# Altium PCB DIO_RJ45_DIOT.PCBDOC (part 5 of 6)
Units mil, origin at the board's own origin, x right, y up, seen from the top; angles counter-clockwise.
Board outline 8758.72 x 3941.04 mil, 4 copper layers (TopLayer, MidLayer1, Internal Plane 1, BottomLayer), stack 46.562 mil thick; 318 components, 196 nets, 1276 pads, 687 vias.
Unrouted connection lines stored in the file: 2.
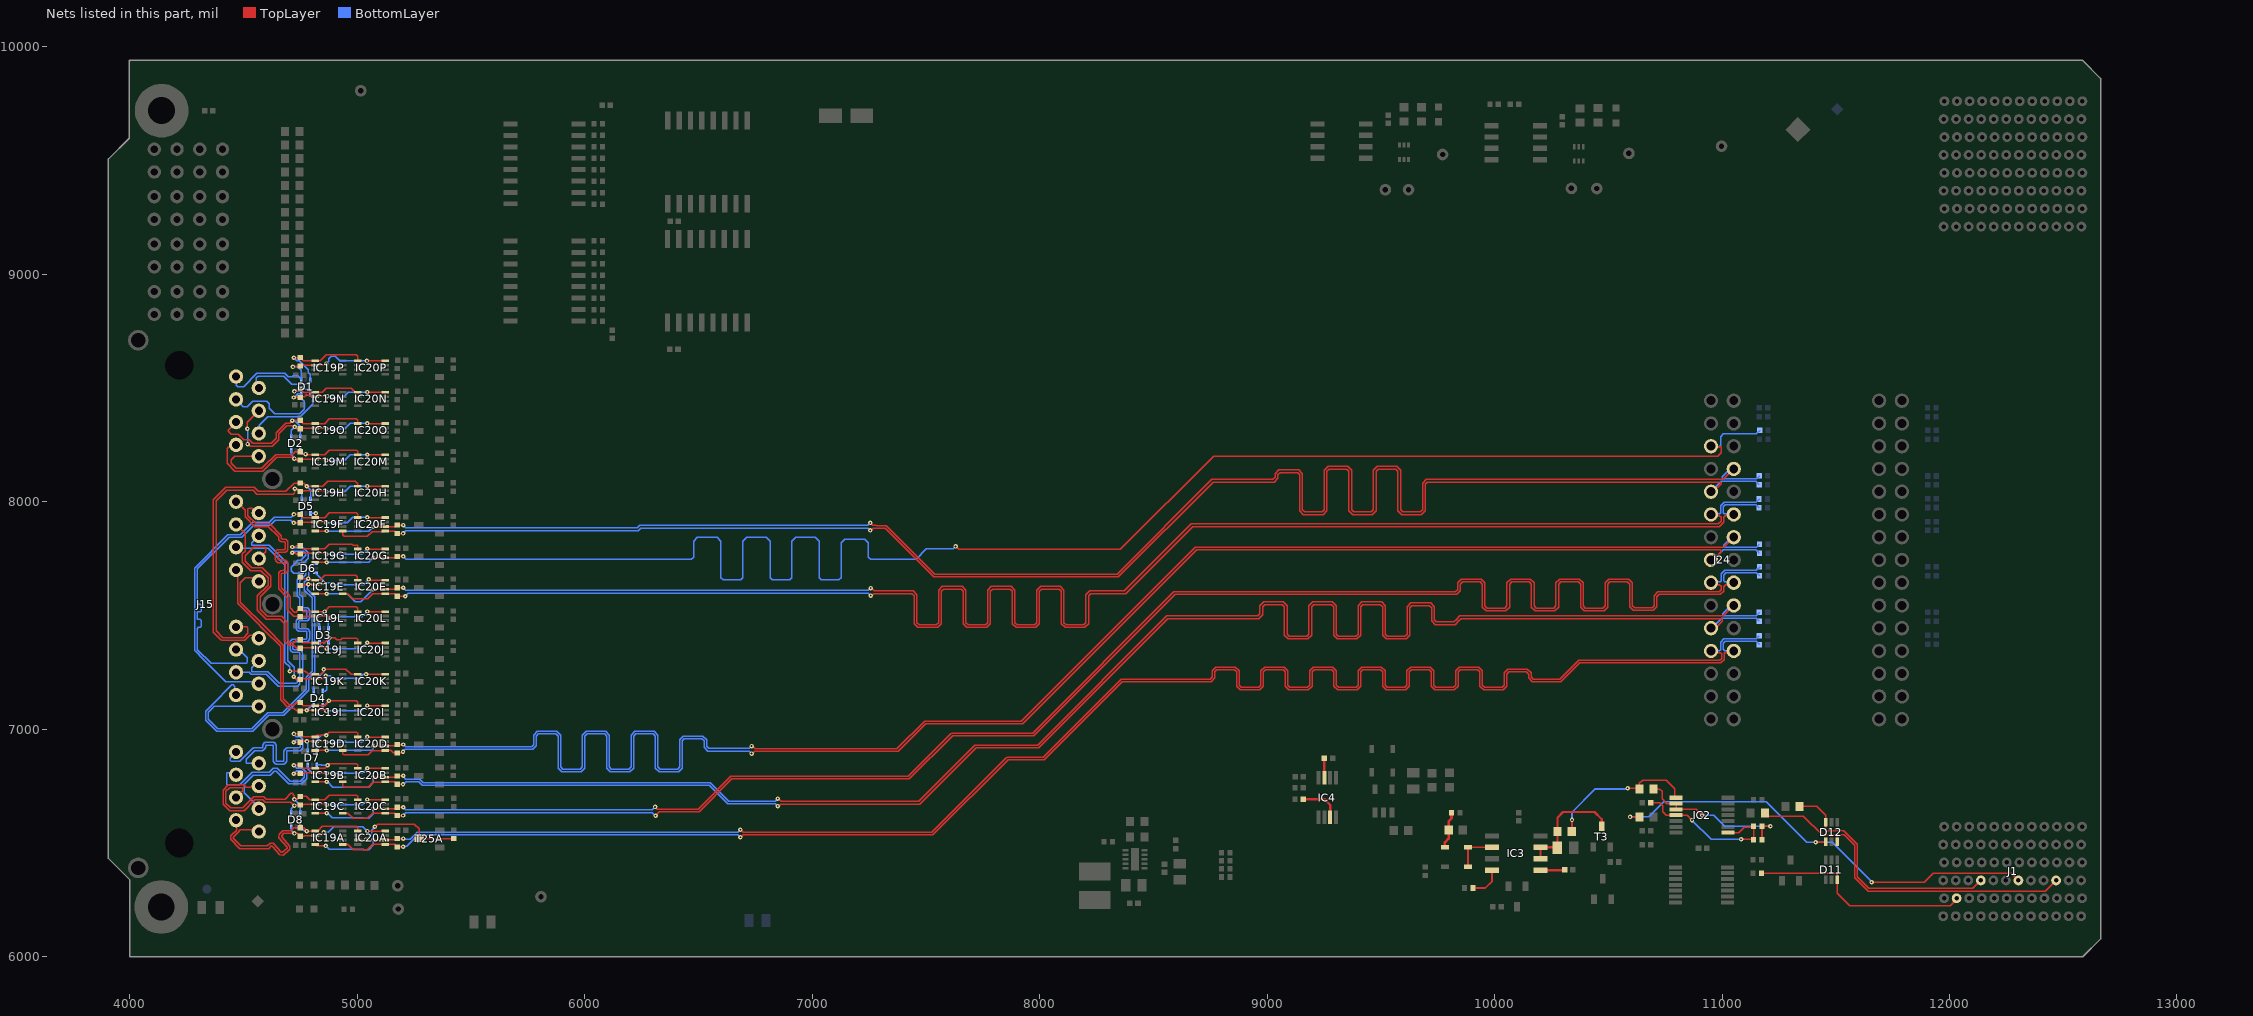
[diagram p6: the nets of this part, all layers, seen from the top]

## Via types
v1: diameter 19.68, hole 7.87, TopLayer to BottomLayer, tented both sides, 672 vias
v2: diameter 31.5, hole 19.68, TopLayer to BottomLayer, 10 vias
v3: diameter 23.62, hole 11.81, TopLayer to BottomLayer, tented both sides, 5 vias

## Nets (pads, with @x,y where several pads share a name; then routed paths per layer and width w, separated by ;. In a path a pad name is that pad's centre, name@x,y a point inside that pad or via, vN(x,y) a via of type N, cw(c..) or ccw(c..) an arc to the next point about the centre after c; other vN are vias at no path point) (continued)
LVDS9_P: IC19G.8 IC20G.6 J24.5 R24.2 R132G.1 | length 7913.8
  TopLayer w6: IC19G.8@4815.1,7732.67 v1(4866.6,7732.67) ; v1(5071.28,7752.35) IC20G.6@5124.15,7752.35 5168.78,7752.35 5176.13,7759.7 R132G.1@5176.13,7758.7 v1(5202.63,7758.7) ; v1(7630.68,7802.45) 7631.17,7802.45 7644.25,7789.37 8354.94,7789.37 8765.21,8199.65 8767.75,8199.65 8767.91,8199.8 10981.49,8199.8 10997.05,8215.36 10997.05,8237.84 10993.53,8241.36 10953.64,8241.36 J24.5@10951.68,8243.33
  BottomLayer w6: v1(4866.6,7732.67) 4867.07,7733.14 5052.07,7733.14 v1(5071.28,7752.35) ; v1(5202.63,7758.7) 5203.66,7758.7 5216.16,7746.2 6463.09,7746.2 6469.6,7746.2 6479.2,7755.8 6479.2,7826.28 6495.83,7842.91 6582.57,7842.91 6599.2,7826.28 6599.2,7665.73 6608.8,7656.13 6685.6,7656.13 6695.2,7665.73 6695.2,7826.28 6711.83,7842.91 6798.57,7842.91 6815.2,7826.28 6815.2,7665.73 6824.8,7656.13 6901.6,7656.13 6911.2,7665.73 6911.2,7826.28 6927.83,7842.91 7014.57,7842.91 7031.2,7826.28 7031.2,7665.73 7040.8,7656.13 7117.6,7656.13 7127.2,7665.73 7127.2,7817.78 7143.83,7834.41 7230.57,7834.41 7247.2,7817.78 7247.2,7755.8 7256.8,7746.2 7310.04,7746.2 7456.83,7746.2 7502.58,7791.95 7620.13,7791.95 v1@7630.63,7802.45 ; J24.5@10953.64,8241.36 10954.19,8241.9 10988.66,8241.9 10993.51,8246.76 10993.51,8285.64 11005.11,8297.24 11150.34,8297.24 11156.67,8303.58 11157.46,8303.58 11165.88,8311.99 R24.2@11165.88,8312.78
LVDS10_N: IC19F.1 IC20F.5 J24.9 R27.2 R132F.2 | length 7737
  TopLayer w6: IC19F.1@4937.15,7870.46 4937.15,7854.19 4944.19,7847.15 5044.93,7847.15 5065.77,7867.99 5121.68,7867.99 IC20F.5@5124.15,7870.46 5166.15,7870.46 5176.13,7860.49 R132F.2@5176.13,7859.49 v1@5201.62,7859.49 ; v1(7255.91,7873.03) 7259.61,7873.03 7269.45,7882.87 7320.87,7882.87 7530.94,7672.8 7534.45,7669.29 8346.46,7669.29 8762.8,8085.63 8864.17,8085.63 9030.98,8085.63 9047.6,8102.25 9047.6,8117.24 9057.2,8126.84 9134,8126.84 9143.6,8117.24 9143.6,7958.94 9160.22,7942.32 9246.95,7942.32 9263.57,7958.94 9263.57,8132.72 9273.17,8142.32 9349.97,8142.32 9359.57,8132.72 9359.57,7958.94 9376.19,7942.32 9462.91,7942.32 9479.53,7958.94 9479.53,8132.72 9489.13,8142.32 9565.93,8142.32 9575.53,8132.72 9575.53,7958.94 9592.16,7942.32 9678.88,7942.32 9695.5,7958.94 9695.5,8076.03 9705.1,8085.63 9711.61,8085.63 10993.64,8085.63 10997.16,8082.12 10997.16,8077.14 10986.14,8066.13 10958.66,8038.65 J24.9@10958.66,8034.45
  BottomLayer w6: v1(5202.13,7859.99) 5214.69,7872.55 6236.66,7872.55 6247.78,7883.67 7245.27,7883.67 v1(7255.91,7873.03) ; J24.9@10951.68,8043.33 10997.13,8088.78 11147.92,8088.78 11154.38,8082.32 11155.16,8082.32 11163.58,8073.9 R27.2@11163.58,8073.11
LVDS10_P: IC19F.8 IC20F.6 J24.8 R26.2 R132F.1 | length 7846.6
  TopLayer w6: IC19F.8@4815.1,7870.46 v1(4866.6,7870.46) ; v1(5071.28,7890.15) IC20F.6@5124.15,7890.15 5168.78,7890.15 5176.13,7897.5 R132F.1@5176.13,7896.5 v1(5202.63,7896.5) ; v1(7255.99,7906.03) 7267.34,7894.69 7281.5,7894.69 7281.56,7894.62 7326.07,7894.62 7539.41,7681.28 8341.49,7681.28 8757.83,8097.61 8864.17,8097.61 9026.01,8097.61 9035.61,8107.21 9035.61,8122.21 9052.23,8138.83 9138.96,8138.83 9155.58,8122.21 9155.58,7963.91 9165.18,7954.31 9241.98,7954.31 9251.58,7963.91 9251.58,8137.69 9268.2,8154.31 9354.93,8154.31 9371.55,8137.69 9371.55,7963.91 9381.15,7954.31 9457.95,7954.31 9467.55,7963.91 9467.55,8137.69 9484.17,8154.31 9570.9,8154.31 9587.52,8137.69 9587.52,7963.91 9597.12,7954.31 9673.92,7954.31 9683.52,7963.91 9683.52,8080.99 9700.14,8097.61 9711.61,8097.61 11005.96,8097.61 J24.8@11051.68,8143.33
  BottomLayer w6: v1(4866.6,7870.46) 5051.6,7870.46 v1(5071.28,7890.15) ; v1(5202.63,7896.5) 5214.57,7884.55 6231.69,7884.55 6242.81,7895.67 7245.63,7895.67 v1(7255.99,7906.03) ; J24.8@11051.68,8143.33 11037.03,8143.33 11001.96,8108.26 11001.96,8103.29 11005.48,8099.78 11150.1,8099.78 11153.61,8103.28 11155.16,8103.28 11163.58,8111.7 R26.2@11163.58,8112.48
LVDS11_N: IC19E.1 IC20E.5 J24.12 R29.2 R132E.2 | length 7738
  TopLayer w6: IC19E.1@4937.15,7594.87 4958.68,7594.87 4981.15,7572.41 5045.78,7572.41 5068.25,7594.87 IC20E.5@5124.15,7594.87 5166.15,7594.87 5176.13,7584.9 R132E.2@5176.13,7583.9 v1(5211.85,7583.9) ; v1(7257.87,7586.61) 7261.58,7586.61 7270.44,7595.47 7324.8,7595.47 7439.07,7595.47 7448.67,7585.87 7448.67,7462.95 7465.19,7446.43 7551.78,7446.43 7568.3,7462.95 7568.3,7605.16 7577.9,7614.76 7654.7,7614.76 7664.3,7605.16 7664.3,7462.95 7680.81,7446.43 7767.4,7446.43 7783.92,7462.95 7783.92,7605.16 7793.52,7614.76 7870.32,7614.76 7879.92,7605.16 7879.92,7462.95 7896.44,7446.43 7983.02,7446.43 7999.54,7462.95 7999.54,7605.16 8009.14,7614.76 8085.94,7614.76 8095.54,7605.16 8095.54,7462.95 8112.06,7446.43 8198.64,7446.43 8215.16,7462.95 8215.16,7585.87 8224.76,7595.47 8280.48,7595.47 8377.95,7595.47 8672.46,7889.98 10988.38,7889.98 11007.5,7909.1 11007.5,7931.4 11014.69,7938.6 11046.95,7938.6 J24.12@11051.68,7943.33
  BottomLayer w6: v1@5212.06,7584.4 5224.62,7596.96 7247.53,7596.96 v1(7257.87,7586.61) ; J24.12@11051.68,7943.33 11048.15,7946.85 11008.87,7946.85 11004.73,7950.99 11004.73,7976.38 11014.17,7985.82 11149.07,7985.82 11153.87,7981.03 11154.65,7981.03 11163.07,7972.61 R29.2@11163.07,7971.82
LVDS11_P: IC19E.8 IC20E.6 J24.11 R28.2 R132E.1 | length 7865.9
  TopLayer w6: IC19E.8@4815.1,7594.87 v1(4866.6,7594.87) ; v1(5071.28,7614.56) IC20E.6@5124.15,7614.56 5168.78,7614.56 5176.13,7621.91 R132E.1@5176.13,7620.91 v1(5202.63,7620.91) ; v1(7257.96,7619.61) 7259.95,7619.61 7272.28,7607.28 7324.8,7607.28 7443.97,7607.28 7460.49,7590.76 7460.49,7467.84 7470.09,7458.24 7546.89,7458.24 7556.49,7467.84 7556.49,7610.06 7573,7626.57 7659.59,7626.57 7676.11,7610.06 7676.11,7467.84 7685.71,7458.24 7762.51,7458.24 7772.11,7467.84 7772.11,7610.06 7788.63,7626.57 7875.21,7626.57 7891.73,7610.06 7891.73,7467.84 7901.33,7458.24 7978.13,7458.24 7987.73,7467.84 7987.73,7610.06 8004.25,7626.57 8090.83,7626.57 8107.35,7610.06 8107.35,7467.84 8116.95,7458.24 8193.75,7458.24 8203.35,7467.84 8203.35,7590.76 8219.87,7607.28 8280.48,7607.28 8373.06,7607.28 8667.57,7901.79 10983.48,7901.79 10995.68,7913.99 10995.68,7931.48 10988.66,7938.5 10966.02,7938.5 J24.11@10959.65,7944.88
  BottomLayer w6: v1(4866.6,7594.87) 4957.19,7594.87 4992.19,7559.88 5016.61,7559.88 v1(5071.28,7614.56) ; v1(5202.63,7620.91) 5214.57,7608.96 7247.31,7608.96 v1(7257.96,7619.61) ; J24.11@10951.68,7943.33 10955.2,7946.85 10990.16,7946.85 10993.73,7950.43 10993.73,7980.94 11009.62,7996.82 11148.65,7996.82 11153.87,8002.04 11154.65,8002.04 11163.07,8010.45 R28.2@11163.07,8011.24
LVDS12_N: IC19D.1 IC20D.5 J24.15 R31.2 R132D.2 | length 7747.2
  TopLayer w6: IC19D.1@4937.15,6905.9 4937.15,6889.58 4940.66,6886.06 5048.41,6886.06 5065.77,6903.43 5121.68,6903.43 IC20D.5@5124.15,6905.9 5148.35,6905.9 5158.44,6895.81 5175.23,6895.81 R132D.2@5176.13,6894.92 5201.62,6894.92 v1(5201.62,6899.62) ; v1(6734.13,6892.14) 6737.84,6892.14 6747.28,6901.57 7378.01,6901.57 7499.07,7022.64 7925.2,7022.64 8689.96,7787.4 10878.03,7787.4 10992.5,7787.4 10996.01,7783.89 10996.01,7778.92 10960.42,7743.33 J24.15@10951.68,7743.33
  BottomLayer w6: v1(5201.62,6899.62) 5201.62,6899.92 5211.98,6910.28 5760.42,6910.28 5771.2,6910.28 5787.24,6926.32 5787.24,6969.05 5796.84,6978.65 5873.64,6978.65 5883.24,6969.05 5883.24,6828.62 5899.29,6812.58 5985.2,6812.58 6001.24,6828.62 6001.24,6969.05 6010.84,6978.65 6087.64,6978.65 6097.24,6969.05 6097.24,6828.62 6113.29,6812.58 6199.2,6812.58 6215.24,6828.62 6215.24,6969.05 6224.84,6978.65 6301.64,6978.65 6311.24,6969.05 6311.24,6828.62 6327.29,6812.58 6413.2,6812.58 6429.24,6828.62 6429.24,6948.05 6438.84,6957.65 6515.64,6957.65 6525.24,6948.05 6525.24,6919.41 6541.29,6903.37 6613.19,6903.37 6722.9,6903.37 v1(6734.13,6892.14) ; J24.15@10960.42,7743.33 11005.31,7788.21 11148.99,7788.21 11155.36,7781.84 11156.15,7781.84 11164.57,7773.43 R31.2@11164.57,7772.64
LVDS12_P: IC19D.8 IC20D.6 J24.14 R30.2 R132D.1 | length 7859.6
  TopLayer w6: IC19D.8@4815.1,6905.9 v1(4866.6,6905.9) ; v1(5071.28,6925.58) IC20D.6@5124.15,6925.58 5168.78,6925.58 5175.63,6932.43 R132D.1@5176.13,6931.93 v1(5202.63,6931.93) ; v1(6734.22,6925.13) 6737.38,6925.13 6749.12,6913.39 7373.11,6913.39 7494.18,7034.45 7920.3,7034.45 8685.07,7799.21 10884.87,7799.21 11007.56,7799.21 J24.14@11051.68,7843.33
  BottomLayer w6: v1(4866.6,6905.9) 4868.13,6907.43 5067.76,6907.43 5071.28,6910.94 v1(5071.28,6925.58) ; v1(5202.63,6931.93) 5202.63,6931.63 5212.99,6921.28 5760.42,6921.28 5766.64,6921.28 5776.24,6930.88 5776.24,6973.61 5792.29,6989.65 5878.2,6989.65 5894.24,6973.61 5894.24,6833.18 5903.84,6823.58 5980.64,6823.58 5990.24,6833.18 5990.24,6973.61 6006.29,6989.65 6092.2,6989.65 6108.24,6973.61 6108.24,6833.18 6117.84,6823.58 6194.64,6823.58 6204.24,6833.18 6204.24,6973.61 6220.29,6989.65 6306.2,6989.65 6322.24,6973.61 6322.24,6833.18 6331.84,6823.58 6408.64,6823.58 6418.24,6833.18 6418.24,6952.61 6434.29,6968.65 6520.2,6968.65 6536.24,6952.61 6536.24,6923.97 6545.84,6914.37 6613.19,6914.37 6723.46,6914.37 v1(6734.22,6925.13) ; J24.14@11051.68,7843.33 11044.11,7843.33 11008.49,7807.7 11008.49,7802.73 11012,7799.21 11151.77,7799.21 11155.36,7802.8 11156.15,7802.8 11164.57,7811.22 R30.2@11164.57,7812.01
LVDS13_N: IC19C.1 IC20C.5 J24.18 R33.2 R132C.2 | length 7704.1
  TopLayer w6: IC19C.1@4937.15,6630.31 4958.68,6630.31 4982,6606.99 5044.93,6606.99 5068.25,6630.31 IC20C.5@5124.15,6630.31 5166.15,6630.31 5176.13,6620.33 R132C.2@5176.13,6619.33 5201.62,6619.33 v1(5202.13,6619.83) ; v1(6312.27,6619.09) 6312.27,6620.2 6328.29,6636.23 6503.59,6636.23 6647.88,6780.51 7428.15,6780.51 7618.11,6970.47 7974.41,6970.47 7981.44,6977.5 8595.47,7591.54 9821.85,7591.54 9833.34,7591.54 9849.97,7608.16 9849.97,7637.24 9859.57,7646.84 9936.37,7646.84 9945.97,7637.24 9945.97,7536.3 9962.59,7519.67 10049.34,7519.67 10065.97,7536.3 10065.97,7637.24 10075.57,7646.84 10152.37,7646.84 10161.97,7637.24 10161.97,7536.3 10178.59,7519.67 10265.34,7519.67 10281.97,7536.3 10281.97,7637.24 10291.57,7646.84 10368.37,7646.84 10377.97,7637.24 10377.97,7536.3 10394.59,7519.67 10481.34,7519.67 10497.97,7536.3 10497.97,7637.24 10507.57,7646.84 10584.37,7646.84 10593.97,7637.24 10593.97,7537.72 10610.59,7521.09 10697.34,7521.09 10713.97,7537.72 10713.97,7581.94 10723.57,7591.54 10968.87,7591.54 10993.35,7591.54 11008.06,7606.25 11008.06,7626.17 11015.75,7633.86 11042.21,7633.86 J24.18@11051.68,7643.33
  BottomLayer w6: v1(5202.13,6619.83) 5214.69,6632.39 6183.3,6632.39 6183.4,6632.29 6297.96,6632.29 6311.15,6619.09 v1(6312.27,6619.09) ; J24.18@11051.68,7643.33 11047.33,7647.67 11010.59,7647.67 11007.07,7651.19 11007.07,7676.95 11016.87,7686.75 11151.63,7686.75 11155.69,7682.69 11156.47,7682.69 11164.89,7674.28 R33.2@11164.89,7673.49
LVDS13_P: IC19C.8 IC20C.6 J24.17 R32.2 R132C.1 | length 7844
  TopLayer w6: IC19C.8@4815.1,6630.31 v1(4866.6,6630.31) ; v1(5071.28,6649.99) IC20C.6@5124.15,6649.99 5168.78,6649.99 5176.13,6657.34 R132C.1@5176.13,6656.34 v1(5202.63,6656.34) ; v1(6310.04,6657.48) 6311.15,6657.48 6320.41,6648.23 6498.62,6648.23 6642.91,6792.51 7423.18,6792.51 7609.63,6978.96 7613.14,6982.47 7969.44,6982.47 8590.5,7603.54 9821.85,7603.54 9828.37,7603.54 9837.97,7613.14 9837.97,7642.21 9854.59,7658.84 9941.34,7658.84 9957.97,7642.21 9957.97,7541.27 9967.57,7531.67 10044.37,7531.67 10053.97,7541.27 10053.97,7642.21 10070.59,7658.84 10157.34,7658.84 10173.97,7642.21 10173.97,7541.27 10183.57,7531.67 10260.37,7531.67 10269.97,7541.27 10269.97,7642.21 10286.59,7658.84 10373.34,7658.84 10389.97,7642.21 10389.97,7541.27 10399.57,7531.67 10476.37,7531.67 10485.97,7541.27 10485.97,7642.21 10502.59,7658.84 10589.34,7658.84 10605.97,7642.21 10605.97,7542.69 10615.57,7533.09 10692.37,7533.09 10701.97,7542.69 10701.97,7586.91 10718.59,7603.54 10968.87,7603.54 10988.38,7603.54 10996.06,7611.22 10996.06,7626.97 10988.33,7634.71 10960.3,7634.71 J24.17@10951.68,7643.33
  BottomLayer w6: v1(4866.6,6630.31) 4868.13,6631.83 4890.13,6609.83 5026.48,6609.83 5029.32,6606.99 5050.28,6606.99 5071.28,6627.99 v1(5071.28,6649.99) ; v1(5202.63,6656.34) 5214.57,6644.39 6188.27,6644.39 6188.38,6644.29 6297.96,6644.29 6310.04,6656.37 v1(6310.04,6657.48) ; J24.17@10951.68,7643.33 10955.71,7647.36 10992.56,7647.36 10996.07,7650.88 10996.07,7681.51 11012.31,7697.75 11149.78,7697.75 11155.69,7703.65 11156.47,7703.65 11164.89,7712.07 R32.2@11164.89,7712.86
LVDS14_N: IC19B.1 IC20B.5 J24.21 R35.2 R132B.2 | length 7733.9
  TopLayer w6: IC19B.1@4937.15,6768.1 4937.15,6746.48 4940.66,6742.97 5048.46,6742.97 5071.13,6765.63 5121.68,6765.63 IC20B.5@5124.15,6768.1 5166.15,6768.1 5176.13,6758.13 R132B.2@5176.13,6757.13 v1(5201.62,6757.13) ; v1(6848.81,6661.17) 6852.51,6661.17 6861.62,6670.28 7473.81,6670.28 7720.86,6917.32 7996.06,6917.32 8563.98,7485.24 8952.76,7485.24 8964.11,7485.24 8980.63,7501.75 8980.63,7537.06 8990.23,7546.66 9067.03,7546.66 9076.63,7537.06 9076.63,7412.75 9093.15,7396.23 9179.73,7396.23 9196.25,7412.75 9196.25,7537.06 9205.85,7546.66 9282.65,7546.66 9292.25,7537.06 9292.25,7412.75 9308.77,7396.23 9395.35,7396.23 9411.87,7412.75 9411.87,7537.06 9421.47,7546.66 9498.27,7546.66 9507.87,7537.06 9507.87,7412.75 9524.39,7396.23 9610.97,7396.23 9627.49,7412.75 9627.49,7532.83 9637.09,7542.43 9713.89,7542.43 9723.49,7532.83 9723.49,7475.64 9740.01,7459.12 9826.6,7459.12 9843.12,7475.64 9852.72,7485.24 9982.28,7485.24 10998.3,7485.24 11001.82,7481.72 11001.82,7474.62 10981.43,7454.23 10962.58,7454.23 J24.21@10951.68,7443.33
  BottomLayer w6: v1(5201.62,6757.13) 5204.28,6757.13 5216.18,6769.03 5271.32,6769.03 5280.2,6760.15 5286.65,6753.71 6548.46,6753.71 6629.92,6672.24 6837.73,6672.24 v1(6848.81,6661.17) ; J24.21@10951.68,7443.33 10955.5,7443.33 10999.31,7487.13 11150.69,7487.13 11154.85,7482.97 11155.64,7482.97 11164.06,7474.55 R35.2@11164.06,7473.77
LVDS14_P: IC19B.8 IC20B.6 J24.20 R34.2 R132B.1 | length 7864.2
  TopLayer w6: IC19B.8@4815.1,6768.1 v1(4866.6,6768.1) ; v1(5071.28,6787.79) IC20B.6@5124.15,6787.79 5168.78,6787.79 5176.13,6795.13 R132B.1@5176.13,6794.13 v1(5202.63,6794.13) ; v1(6848.9,6694.16) 6851.39,6694.16 6863.47,6682.09 7468.92,6682.09 7715.97,6929.13 7991.17,6929.13 8559.08,7497.05 8952.76,7497.05 8959.22,7497.05 8968.82,7506.65 8968.82,7541.95 8985.33,7558.47 9071.92,7558.47 9088.44,7541.95 9088.44,7417.64 9098.04,7408.04 9174.84,7408.04 9184.44,7417.64 9184.44,7541.95 9200.96,7558.47 9287.54,7558.47 9304.06,7541.95 9304.06,7417.64 9313.66,7408.04 9390.46,7408.04 9400.06,7417.64 9400.06,7541.95 9416.58,7558.47 9503.16,7558.47 9519.68,7541.95 9519.68,7417.64 9529.28,7408.04 9606.08,7408.04 9615.68,7417.64 9615.68,7537.72 9632.2,7554.24 9718.79,7554.24 9735.3,7537.72 9735.3,7480.53 9744.9,7470.93 9821.7,7470.93 9831.3,7480.53 9847.82,7497.05 9982.28,7497.05 11005.4,7497.05 J24.20@11051.68,7543.33
  BottomLayer w6: v1(4866.6,6768.1) 4868.13,6769.63 4892.97,6744.79 5050.28,6744.79 5071.28,6765.79 v1(5071.28,6787.79) ; v1(5202.63,6794.13) 5202.63,6791.49 5214.09,6780.03 5275.88,6780.03 5291.2,6764.71 6553.02,6764.71 6634.48,6683.24 6837.98,6683.24 v1(6848.9,6694.16) ; J24.20@11051.68,7543.33 11040.2,7543.33 11003.49,7506.62 11003.49,7501.65 11007,7498.13 11149.77,7498.13 11154.85,7503.21 11155.64,7503.21 11164.05,7511.63 R34.2@11164.05,7512.42
LVDS15_N: IC19A.1 IC20A.5 J24.24 R37.2 R132A.2 | length 7721.5
  TopLayer w6: IC19A.1@4937.15,6492.51 4958.68,6492.51 4982,6469.2 5044.93,6469.2 5068.25,6492.51 IC20A.5@5124.15,6492.51 5166.15,6492.51 5176.13,6482.54 R132A.2@5176.13,6481.54 v1@5201.62,6481.54 ; v1(6684.92,6524.3) 6688.62,6524.3 6688.62,6524.51 6698.39,6534.28 7530.15,6534.28 7861.84,6865.97 8020.5,6865.97 8362.96,7208.43 8743.11,7208.43 8753.89,7208.43 8769.93,7224.47 8769.93,7252 8779.53,7261.6 8856.33,7261.6 8865.93,7252 8865.93,7187.59 8881.98,7171.55 8967.89,7171.55 8983.93,7187.59 8983.93,7252 8993.53,7261.6 9070.33,7261.6 9079.93,7252 9079.93,7187.59 9095.98,7171.55 9181.89,7171.55 9197.93,7187.59 9197.93,7252 9207.53,7261.6 9284.33,7261.6 9293.93,7252 9293.93,7187.59 9309.98,7171.55 9395.89,7171.55 9411.93,7187.59 9411.93,7252 9421.53,7261.6 9498.33,7261.6 9507.93,7252 9507.93,7187.59 9523.98,7171.55 9609.89,7171.55 9625.93,7187.59 9625.93,7252 9635.53,7261.6 9712.33,7261.6 9721.93,7252 9721.93,7187.59 9737.98,7171.55 9823.89,7171.55 9839.93,7187.59 9839.93,7252 9849.53,7261.6 9926.33,7261.6 9935.93,7252 9935.93,7187.59 9951.98,7171.55 10037.89,7171.55 10053.93,7187.59 10053.93,7241.79 10063.53,7251.39 10140.33,7251.39 10149.93,7241.79 10149.93,7224.47 10165.98,7208.43 10197.83,7208.43 10292.09,7208.43 10374.83,7291.17 10995.48,7291.17 11009.25,7304.94 11009.25,7332.08 11012.77,7335.59 11043.94,7335.59 J24.24@11051.68,7343.33
  BottomLayer w6: v1(5202.13,6482.04) 5204.74,6484.66 5217.73,6484.66 5236.29,6503.22 5268.51,6535.43 6673.79,6535.43 v1(6684.92,6524.3) ; J24.24@11051.36,7343.01 11011.99,7343.01 11005.34,7349.67 11005.34,7377.38 11013.2,7385.25 11150.66,7385.25 11164.06,7371.85 R37.2@11164.06,7371.06
LVDS15_P: IC19A.8 IC20A.6 J24.23 R36.2 R132A.1 | length 7854.7
  TopLayer w6: IC19A.8@4815.1,6492.51 4821.39,6486.22 v1(4862.2,6486.22) ; v1(5071.28,6512.2) IC20A.6@5124.15,6512.2 5168.78,6512.2 5175.63,6519.04 R132A.1@5176.13,6518.54 v1(5202.63,6518.54) ; v1(6685,6557.3) 6685.48,6557.3 6697.5,6545.28 7525.59,6545.28 7854.06,6873.75 7857.28,6876.97 8015.94,6876.97 8358.4,7219.43 8743.11,7219.43 8749.33,7219.43 8758.93,7229.03 8758.93,7256.55 8774.98,7272.6 8860.89,7272.6 8876.93,7256.55 8876.93,7192.15 8886.53,7182.55 8963.33,7182.55 8972.93,7192.15 8972.93,7256.55 8988.98,7272.6 9074.89,7272.6 9090.93,7256.55 9090.93,7192.15 9100.53,7182.55 9177.33,7182.55 9186.93,7192.15 9186.93,7256.55 9202.98,7272.6 9288.89,7272.6 9304.93,7256.55 9304.93,7192.15 9314.53,7182.55 9391.33,7182.55 9400.93,7192.15 9400.93,7256.55 9416.98,7272.6 9502.89,7272.6 9518.93,7256.55 9518.93,7192.15 9528.53,7182.55 9605.33,7182.55 9614.93,7192.15 9614.93,7256.55 9630.98,7272.6 9716.89,7272.6 9732.93,7256.55 9732.93,7192.15 9742.53,7182.55 9819.33,7182.55 9828.93,7192.15 9828.93,7256.55 9844.98,7272.6 9930.89,7272.6 9946.93,7256.55 9946.93,7192.15 9956.53,7182.55 10033.33,7182.55 10042.93,7192.15 10042.93,7246.35 10058.98,7262.39 10144.89,7262.39 10160.93,7246.35 10160.93,7229.03 10170.53,7219.43 10197.83,7219.43 10287.53,7219.43 10370.27,7302.17 10990.93,7302.17 10998.25,7309.49 10998.25,7330 10992.66,7335.59 10959.41,7335.59 J24.23@10951.68,7343.33
  BottomLayer w6: v1(4862.2,6486.22) 4876.39,6472.04 5026.48,6472.04 5029.32,6469.2 5050.28,6469.2 5071.28,6490.2 v1(5071.28,6512.2) ; v1(5202.63,6518.54) 5205.21,6515.96 5233.48,6515.96 5263.95,6546.43 6674.14,6546.43 v1(6685,6557.3) ; J24.23@10951.68,7343.33 10951.89,7343.54 10988.66,7343.54 10994.34,7349.22 10994.34,7381.94 11008.65,7396.25 11149.75,7396.25 11154.17,7400.68 11155.64,7400.68 11164.06,7409.09 R36.2@11164.06,7409.88
LVDS_IOAA_N: D8.4 IC19A.5 IC20A.1 J15.8A R131A.1 | length 915.6
  TopLayer w6: J15.8A@4567.72,6549.21 4560.24,6556.68 4485.27,6556.68 4481.75,6553.17 4481.75,6551.01 4455.53,6524.79 4455.53,6519.82 4489.13,6486.22 4551.85,6486.22 4605.71,6486.22 4617.46,6497.97 4620.14,6497.97 4632.51,6497.16 4634.25,6495.42 4666.93,6458.13 4671.73,6457.82 4692.18,6475.74 4692.5,6480.54 4655.85,6522.35 4655.85,6524.81 4656.66,6537.18 4669.93,6550.44 4672.68,6553.2 4709.76,6553.2 4722.27,6565.7 R131A.1@4749.13,6565.7 4764.33,6565.7 v1(4778.46,6551.57) IC19A.5@4815.1,6551.57 4826.46,6551.57 4846.94,6572.04 4997.13,6572.04 5002.1,6567.06 IC20A.1@5002.1,6551.57
  BottomLayer w6: D8.4@4749.81,6570.89 4769.13,6551.57 v1(4778.46,6551.57)
LVDS_IOAA_P: D8.6 IC19A.6 IC20A.8 J15.7A R131A.2 | length 1006.6
  TopLayer w6: J15.7A@4467.72,6599.21 4469.75,6597.18 4469.75,6555.98 4443.53,6529.76 4443.53,6514.85 4484.16,6474.22 4562.37,6474.22 4610.68,6474.22 4622.26,6485.81 4626.99,6485.49 4659.67,6448.21 4661.41,6446.47 4673.61,6445.67 4676.07,6445.67 4702.11,6468.49 4703.84,6470.22 4704.65,6482.43 4704.65,6484.88 4668,6526.7 4668.34,6531.89 4677.65,6541.2 4678.03,6541.2 v1(4724.41,6541.2) 4736.62,6541.2 R131A.2@4749.13,6528.69 4764.33,6528.69 4767.52,6531.88 IC19A.6@4815.1,6531.88 4838.97,6531.88 v1(4852.35,6545.26) ; v1(5044.97,6551.2) 5123.78,6551.2 IC20A.8@5124.15,6551.57
  BottomLayer w6: D8.6@4710.44,6570.89 4710.44,6555.16 v1(4724.41,6541.2) ; v1(4852.35,6545.26) 4872.58,6545.26 4898.2,6570.88 5025.28,6570.88 v1(5044.97,6551.2)
LVDS_IOAB_N: D7.4 IC19B.5 IC20B.1 J15.6A R131B.1 | length 927.9
  TopLayer w6: v1(4722.13,6840.79) 4722.63,6841.29 R131B.1@4749.13,6841.29 4763.26,6827.16 4856.65,6827.16 v1(4870.05,6840.55) 4877.13,6847.63 4997.13,6847.63 5002.1,6842.65 IC20B.1@5002.1,6827.16
  BottomLayer w6: J15.6A@4567.72,6649.21 4567.72,6655.07 4502.94,6719.84 4502.94,6745.69 4502.94,6756.88 4543.78,6797.72 4617.5,6797.72 4634.75,6814.96 4643.7,6814.96 4660.94,6797.72 4693,6765.66 4700.03,6758.63 4755.88,6758.63 4759.39,6762.15 4779.24,6781.99 4779.24,6807.96 4758.91,6828.29 4734.63,6828.29 v1(4722.13,6840.79) ; D7.4@4821.85,6841.93 4842.05,6841.93 4843.57,6840.41 4859.18,6840.41 4860.7,6841.93 4865.52,6841.93 4868.47,6838.98 v1(4870.05,6840.55)
LVDS_IOAB_P: D7.6 IC19B.6 IC20B.8 J15.3A R131B.2 | length 1092.8
  TopLayer w6: v1(4721.13,6803.79) 4721.62,6804.28 R131B.2@4749.13,6804.28 ; R131B.2@4749.13,6807.47 4865.22,6807.47 v1(4867.09,6805.6) ; v1(5044.13,6827.63) 5044.97,6826.79 5123.78,6826.79 IC20B.8@5124.15,6827.16
  BottomLayer w6: J15.3A@4467.72,6799.21 4458.86,6808.07 4429.74,6808.07 4426.22,6804.56 4426.22,6757.45 4429.74,6753.94 4483.03,6753.94 4538.81,6809.72 4612.87,6809.72 4630.91,6827.76 4647.88,6827.76 4672.94,6802.69 4705,6770.63 4750.91,6770.63 4767.24,6786.96 4767.24,6802.99 4753.94,6816.29 4733.63,6816.29 v1(4721.13,6803.79) ; D7.6@4782.48,6841.93 4782.48,6825.79 4801.64,6806.63 4866.06,6806.63 v1(4867.09,6805.6) 5022.09,6805.6 v1(5044.13,6827.63)
LVDS_IOAC_N: D8.3 IC19C.5 IC20C.1 J15.5A R131C.1 | length 939.8
  TopLayer w6: J15.5A@4467.72,6699.21 4497.52,6729.02 4497.52,6742.13 4438.98,6742.13 4422.81,6725.96 4422.81,6674.68 4443.95,6653.54 4497.81,6653.54 4545.97,6701.71 4589.46,6701.71 4600.68,6690.49 4683.09,6690.49 4709.21,6716.62 4714.18,6716.62 4724.41,6706.39 v1(4724.41,6690.49) ; v1@4721.39,6690.49 v1(4724.41,6690.49) ; IC20C.1@5002.1,6689.36 5002.1,6704.86 4997.13,6709.83 4877.13,6709.83 4856.65,6689.36 IC19C.5@4815.1,6689.36 4791.1,6689.36 4776.96,6703.5 R131C.1@4749.13,6703.5 4736.12,6690.49 v1(4724.41,6690.49)
  BottomLayer w6: v1(4724.41,6690.49) 4749.81,6665.09 D8.3@4749.81,6633.09
LVDS_IOAC_P: D8.1 IC19C.6 IC20C.8 J15.4A R131C.2 | length 1038.9
  TopLayer w6: J15.4A@4567.72,6749.21 4562.79,6744.28 4512.33,6744.28 4502.49,6754.13 4434.01,6754.13 4410.81,6730.93 4410.81,6669.71 4438.98,6641.54 4502.78,6641.54 4550.94,6689.71 4584.49,6689.71 4595.71,6678.49 4709.28,6678.49 v1(4724.4,6663.37) 4727.52,6666.49 R131C.2@4749.13,6666.49 4764.33,6666.49 4767.52,6669.68 IC19C.6@4815.1,6669.68 4816.26,6670.83 4860.13,6670.83 v1@4864.63,6666.33 ; v1(5044.13,6689.83) 5044.97,6688.99 5123.78,6688.99 IC20C.8@5124.15,6689.36
  BottomLayer w6: D8.1@4710.44,6633.09 4710.44,6649.41 v1(4724.4,6663.37) ; v1(4866.11,6667.8) 5022.09,6667.8 v1(5044.13,6689.83)
LVDS_IOAD_N: D7.3 IC19D.5 IC20D.1 J15.2A R131D.1 | length 983.1
  TopLayer w6: v1(4722.13,6978.58) 4722.63,6979.09 R131D.1@4749.13,6979.09 4749.91,6979.09 4758.33,6970.67 4758.33,6969.88 4763.26,6964.95 IC19D.5@4815.1,6964.95 4822.93,6972.78 v1(4864.41,6972.78) 4864.48,6972.78 4877.13,6985.43 4997.13,6985.43 5002.1,6980.45 IC20D.1@5002.1,6964.95
  BottomLayer w6: J15.2A@4567.72,6849.21 4515.4,6849.21 4511.89,6852.73 4511.89,6866.94 4550.27,6905.32 4570.87,6905.32 4579.87,6905.32 ccw(c4579.87,6923.32) 4597.87,6923.32 4597.87,6926.33 cw(c4601.27,6926.33) 4601.27,6929.73 4628.47,6929.73 cw(c4628.47,6926.33) 4631.87,6926.33 4631.87,6861.13 ccw(c4647.27,6861.13) 4647.27,6845.73 4674.47,6845.73 ccw(c4674.47,6861.13) 4689.87,6861.13 4689.87,6899.32 cw(c4695.87,6899.32) 4695.87,6905.32 4728.43,6905.32 4750.58,6905.32 4761.13,6915.87 4761.13,6937.02 4760.69,6937.46 4760.69,6954.12 4748.93,6965.87 4731.71,6965.87 4722.13,6975.46 v1(4722.13,6978.58) ; D7.3@4821.85,6904.13 4821.85,6952.02 4842.62,6972.78 v1(4864.41,6972.78)
LVDS_IOAD_P: D7.1 IC19D.6 IC20D.8 J15.1A R131D.2 | length 1039.7
  TopLayer w6: v1(4721.13,6941.58) 4721.62,6942.08 R131D.2@4749.13,6942.08 ; R131D.2@4755.78,6945.27 v1(4779.53,6945.27) IC19D.6@4815.1,6945.27 4857.58,6945.27 4861.42,6941.43 v1(4865.13,6941.43) ; v1(5044.13,6965.43) 5044.97,6964.58 5123.78,6964.58 IC20D.8@5124.15,6964.95
  BottomLayer w6: J15.1A@4467.72,6899.21 4467.72,6897.87 4442.24,6872.39 4442.24,6861.23 4445.75,6857.72 4484.78,6857.72 4541.97,6914.91 4542.89,6914.91 4545.3,6917.32 4570.87,6917.32 4579.87,6917.32 ccw(c4579.87,6923.32) 4585.87,6923.32 4585.87,6926.33 cw(c4601.27,6926.33) 4601.27,6941.73 4628.47,6941.73 cw(c4628.47,6926.33) 4643.87,6926.33 4643.87,6861.13 ccw(c4647.27,6861.13) 4647.27,6857.73 4674.47,6857.73 ccw(c4674.47,6861.13) 4677.87,6861.13 4677.87,6899.32 cw(c4695.87,6899.32) 4695.87,6917.32 4728.43,6917.32 4745.61,6917.32 4749.13,6920.84 4749.13,6932.05 4748.69,6932.49 4748.69,6949.15 4743.96,6953.87 4731.71,6953.87 4721.13,6943.29 v1(4721.13,6941.58) ; v1(4779.53,6945.27) 4782.48,6942.32 D7.1@4782.48,6904.13 ; v1(4865.13,6941.43) 5020.13,6941.43 v1(5044.13,6965.43)
LVDS_IOAE_N: D6.4 IC19E.5 IC20E.1 J15.8B R131E.1 | length 1673.5
  TopLayer w6: R131E.1@4749.13,7668.06 4755.94,7661.25 4788.86,7661.25 4793.27,7656.84 4812.2,7656.84 IC19E.5@4815.1,7653.93 4816.66,7655.48 4836.91,7655.48 4852.55,7671.12 4857.01,7675.58 4994.23,7675.58 5000,7669.81 5000,7656.84 5002.1,7654.73 IC20E.1@5002.1,7653.93
  BottomLayer w6: J15.8B@4567.72,7099.21 4369.88,7099.21 4366.66,7095.99 4344.49,7073.82 4344.49,7043.31 4386.81,7000.98 4536.42,7000.98 4600.03,7064.6 4606.48,7071.04 4672.53,7071.04 4776.34,7174.86 4776.34,7228.41 4802.44,7254.5 4802.44,7576.69 4768.3,7610.83 4768.3,7644.39 4786.74,7662.84 4786.74,7707.1 4801.78,7722.13 4811.94,7722.13 D6.4@4816.72,7726.91
  other v1: 4785.15,7661.25
LVDS_IOAE_P: D6.6 IC19E.6 IC20E.8 J15.7B R131E.2 | length 1755.4
  TopLayer w6: R131E.2@4749.13,7631.06 4749.46,7631.39 4766.82,7631.39 4770.51,7635.09 4784.7,7635.09 v1(4786.14,7636.53) 4787.28,7635.38 4801.37,7635.38 4802.51,7634.24 4842.32,7634.24 v1(4851.8,7643.73) ; v1(5050.93,7657.48) 5054.48,7653.93 IC20E.8@5124.15,7653.93
  BottomLayer w6: J15.7B@4467.72,7149.21 4462.43,7154.5 4462.43,7186.19 4454.35,7194.27 4449.38,7194.27 4362.1,7106.99 4333.49,7078.38 4333.49,7038.75 4382.25,6989.98 4540.97,6989.98 4611.03,7060.04 4677.08,7060.04 4787.34,7170.3 4787.34,7223.85 4813.44,7249.95 4813.44,7581.24 4780.8,7613.89 4780.8,7619.89 4783.52,7622.61 4783.52,7633.91 v1(4786.14,7636.53) ; D6.6@4816.72,7687.54 4851.8,7652.47 v1(4851.8,7643.73) 4885.13,7643.73 4893.77,7635.09 5028.53,7635.09 v1(5050.93,7657.48)
LVDS_IOAF_N: D5.4 IC19F.5 IC20F.1 J15.6B R131F.1 | length 1595.7
  TopLayer w6: v1(4722.13,7943.15) 4722.63,7943.65 R131F.1@4749.13,7943.65 4763.26,7929.52 IC19F.5@4815.1,7929.52 ; v1(4818.9,7948.82) 4818.9,7933.32 IC19F.5@4815.1,7929.52 ; IC20F.1@5002.1,7929.52 5002.1,7945.02 4997.13,7949.99 4877.13,7949.99 4856.65,7929.52 IC19F.5@4815.1,7929.52
  BottomLayer w6: J15.6B@4567.72,7199.21 4558.21,7208.72 4421.95,7208.72 4351.93,7278.74 4320.82,7309.85 4289.74,7340.92 4286.23,7344.44 4286.23,7708.71 4289.74,7712.23 4431.85,7854.33 4486.86,7854.33 4541.24,7908.72 4614.19,7908.72 4636.12,7930.65 4709.63,7930.65 v1(4722.13,7943.15) ; D5.4@4795.28,7948.23 4818.31,7948.23 v1(4818.9,7948.82)
LVDS_IOAF_P: D5.6 IC19F.6 IC20F.8 J15.3B R131F.2 | length 1729.1
  TopLayer w6: v1(4721.13,7906.15) 4721.62,7906.65 R131F.2@4749.13,7906.65 ; R131F.2@4755.78,7909.83 IC19F.6@4815.1,7909.83 4816.26,7910.99 4860.13,7910.99 v1(4865.13,7905.99) ; v1(5044.13,7929.99) 5044.97,7929.15 5123.78,7929.15 IC20F.8@5124.15,7929.52
  BottomLayer w6: J15.3B@4467.72,7349.21 4481.5,7349.21 4517.72,7312.99 4517.72,7293.31 4514.12,7289.71 4357.93,7289.71 4298.23,7349.41 4298.23,7404.53 4298.23,7441.53 cw(c4304.23,7441.53) 4304.23,7447.53 4310.38,7447.53 ccw(c4310.38,7450.93) 4313.78,7450.93 4313.78,7478.13 ccw(c4310.38,7478.13) 4310.38,7481.53 4300.63,7481.53 cw(c4300.63,7484.93) 4297.23,7484.93 4297.23,7512.13 cw(c4300.63,7512.13) 4300.63,7515.53 4310.38,7515.53 ccw(c4310.38,7518.93) 4313.78,7518.93 4313.78,7546.13 ccw(c4310.38,7546.13) 4310.38,7549.53 4304.23,7549.53 cw(c4304.23,7555.53) 4298.23,7555.53 4298.23,7608.27 4298.23,7703.74 4436.82,7842.33 4491.83,7842.33 4546.21,7896.72 4619.16,7896.72 4641.09,7918.65 4708.63,7918.65 v1(4721.13,7906.15) 4739.81,7906.15 4755.91,7922.24 D5.6@4755.91,7948.23 ; v1(4865.13,7905.99) 4956.31,7905.99 4980.31,7929.99 v1(5044.13,7929.99)
LVDS_IOAG_N: D6.3 IC19G.5 IC20G.1 J15.5B R131G.1 | length 1526
  TopLayer w6: v1(4714.57,7800.2) 4728.26,7800.2 4733.92,7805.86 R131G.1@4749.13,7805.86 4763.26,7791.72 4856.65,7791.72 4877.13,7812.2 4977.21,7812.2 4982.25,7807.15 5002.1,7807.15 IC20G.1@5002.1,7791.72
  BottomLayer w6: J15.5B@4467.72,7249.21 4525.16,7249.21 4533.79,7240.58 4601.33,7240.58 4653.56,7188.35 4738.02,7188.35 4748.56,7198.89 4748.56,7216.18 4759.97,7227.59 4759.97,7298.46 4759.97,7331.53 ccw(c4741.97,7331.53) 4741.97,7349.53 4721.28,7349.53 cw(c4721.28,7352.93) 4717.88,7352.93 4717.88,7380.13 cw(c4721.28,7380.13) 4721.28,7383.53 4775.54,7383.53 ccw(c4775.54,7398.93) 4790.94,7398.93 4790.94,7426.13 ccw(c4775.54,7426.13) 4775.54,7441.53 4747.8,7441.53 cw(c4747.8,7444.93) 4744.4,7444.93 4744.4,7472.13 cw(c4747.8,7472.13) 4747.8,7475.53 4775.54,7475.53 ccw(c4775.54,7490.93) 4790.94,7490.93 4790.94,7518.13 ccw(c4775.54,7518.13) 4775.54,7533.53 4765.97,7533.53 cw(c4765.97,7539.53) 4759.97,7539.53 4759.97,7548.53 4759.97,7578.92 4748.68,7590.21 4748.68,7651.85 4774.74,7677.91 4774.74,7697.18 4774.65,7697.27 4774.65,7697.51 4774.74,7697.6 4774.74,7716.86 4769.47,7722.13 4767.28,7722.13 4767.28,7726.91 4762.4,7726.91 4785.62,7750.13 4785.62,7775.75 4763.94,7797.43 4717.33,7797.43 v1(4714.57,7800.2)
LVDS_IOAG_P: D6.1 IC19G.6 IC20G.8 J15.4B R131G.2 | length 1612.4
  TopLayer w6: v1(4714.57,7774.51) 4728.26,7774.51 4733.92,7768.85 R131G.2@4749.13,7768.85 4755.78,7772.04 IC19G.6@4815.1,7772.04 4816.26,7773.2 4860.13,7773.2 v1(4865.13,7768.2) ; v1(5044.13,7792.2) 5044.97,7791.35 5123.78,7791.35 IC20G.8@5124.15,7791.72
  BottomLayer w6: J15.4B@4567.72,7299.21 4537.4,7268.9 4537.4,7253.94 4538.76,7252.58 4606.3,7252.58 4658.53,7200.35 4733.05,7200.35 4736.56,7203.86 4736.56,7219.86 4739.49,7222.78 4739.49,7224.08 4747.97,7232.56 4747.97,7298.46 4747.97,7331.53 ccw(c4741.97,7331.53) 4741.97,7337.53 4721.28,7337.53 cw(c4721.28,7352.93) 4705.88,7352.93 4705.88,7380.13 cw(c4721.28,7380.13) 4721.28,7395.53 4775.54,7395.53 ccw(c4775.54,7398.93) 4778.94,7398.93 4778.94,7426.13 ccw(c4775.54,7426.13) 4775.54,7429.53 4747.8,7429.53 cw(c4747.8,7444.93) 4732.4,7444.93 4732.4,7472.13 cw(c4747.8,7472.13) 4747.8,7487.53 4775.54,7487.53 ccw(c4775.54,7490.93) 4778.94,7490.93 4778.94,7518.13 ccw(c4775.54,7518.13) 4775.54,7521.53 4765.97,7521.53 cw(c4765.97,7539.53) 4747.97,7539.53 4747.97,7548.53 4747.97,7573.95 4736.68,7585.24 4736.68,7656.82 4747.13,7667.27 4747.13,7685.7 4738.12,7685.7 4737.93,7685.51 4722.32,7685.51 4711.28,7696.55 4711.28,7712.16 4734.3,7735.17 4734.3,7736.55 4739.57,7741.82 4751.66,7741.82 4773.62,7763.78 4773.62,7770.78 4763.05,7781.35 4721.41,7781.35 v1(4714.57,7774.51) ; v1(4865.13,7768.2) 5020.13,7768.2 v1(5044.13,7792.2)
LVDS_IOAH_N: D5.3 IC19H.5 IC20H.1 J15.2B R131H.1 | length 1584
  TopLayer w6: J15.2B@4567.72,7399.21 4557.09,7399.21 4544.88,7411.42 4527.56,7411.42 4505.85,7389.71 4450.94,7389.71 4450.81,7389.57 4404.48,7389.57 4400.83,7393.22 4367.92,7426.13 4367.92,8008.11 4421.82,8062.01 4547.24,8062.01 4564.32,8044.94 4687.22,8044.94 4723.74,8081.45 R131H.1@4749.13,8081.45 4764.33,8081.45 v1(4778.46,8067.32) IC19H.5@4815.1,8067.32 4848.81,8067.32 4870.46,8088.97 4991.74,8088.97 5002.1,8078.61 IC20H.1@5002.1,8067.32
  BottomLayer w6: v1(4778.46,8067.32) 4795.28,8050.5 D5.3@4795.28,8010.43
LVDS_IOAH_P: D5.1 IC19H.6 IC20H.8 J15.1B R131H.2 | length 1699.1
  TopLayer w6: J15.1B@4467.72,7449.21 4516.68,7449.21 4520.2,7445.7 4520.2,7421.03 4500.88,7401.71 4409.32,7401.71 4379.92,7431.1 4379.92,8003.14 4426.79,8050.01 4542.27,8050.01 4559.35,8032.94 4719.58,8032.94 4723.09,8036.45 4723.09,8036.65 4726.61,8040.17 v1(4726.61,8056.5) 4737.07,8056.5 R131H.2@4749.13,8044.44 4764.33,8044.44 4767.52,8047.63 IC19H.6@4815.1,8047.63 4861.28,8047.63 v1(4865.13,8043.79) ; v1(5044.13,8067.79) 5044.97,8066.94 5123.78,8066.94 IC20H.8@5124.15,8067.32
  BottomLayer w6: J15.1B@4467.72,7449.21 J15.1B@4479.13,7460.63 ; v1(4726.61,8056.5) 4735.43,8056.5 4755.91,8036.02 D5.1@4755.91,8010.43 ; v1(4865.13,8043.79) 4946.47,8043.79 4970.47,8067.79 v1(5044.13,8067.79)
LVDS_IOAI_N: D4.4 IC19I.5 IC20I.1 J15.8C R131I.1 | length 1101.3
  TopLayer w6: J15.8C@4567.72,7649.21 4552.29,7649.21 4536.28,7665.23 4507.75,7665.23 4486.41,7643.89 4486.41,7558.12 4601.62,7442.91 4675.2,7369.33 4675.2,7133.91 4704.72,7104.38 4721.42,7104.38 4733.92,7116.88 4749.91,7116.88 4758.33,7108.46 4758.33,7107.68 4763.26,7102.75 IC19I.5@4815.1,7102.75 4856.65,7102.75 4876.22,7122.32 v1(4876.22,7124.36) 4995.98,7124.36 5002.1,7118.24 IC20I.1@5002.1,7102.75
  BottomLayer w6: D4.4@4848.43,7103.74 4857.65,7103.74 4876.22,7122.32 v1(4876.22,7124.36)
LVDS_IOAI_P: D4.6 IC19I.6 IC20I.8 J15.7C R131I.2 | length 1178.1
  TopLayer w6: J15.7C@4467.72,7699.21 4474.41,7692.52 4474.41,7553.15 4477.92,7549.64 4557.09,7470.47 4590.23,7437.33 4663.2,7364.36 4663.2,7128.93 4699.75,7092.38 4721.42,7092.38 4733.92,7079.87 R131I.2@4749.13,7079.87 ; R131I.2@4755.78,7083.06 4778.54,7083.06 IC19I.6@4815.1,7083.06 4816.26,7084.22 4860.13,7084.22 v1(4865.13,7079.22) ; v1(5044.13,7103.22) 5044.97,7102.38 5123.78,7102.38 IC20I.8@5124.15,7102.75
  BottomLayer w6: v1(4778.54,7082.68) 4799.61,7103.74 D4.6@4809.06,7103.74 ; v1(4865.13,7079.22) 5020.13,7079.22 v1(5044.13,7103.22)
LVDS_IOAJ_N: D3.4 IC19J.5 IC20J.1 J15.6C R131J.1 | length 1091.4
  TopLayer w6: J15.6C@4567.72,7749.21 4597.44,7778.94 4597.44,7795.7 4593.93,7799.21 4545.46,7799.21 4507.87,7761.62 4507.87,7738.38 4537.4,7708.85 4582.32,7708.85 4620.21,7670.96 4620.21,7627.47 4589.46,7596.72 4573.34,7580.6 4573.34,7526.73 4605.14,7494.94 4667.7,7494.94 4692.46,7470.18 4692.46,7392.23 4704.72,7379.97 4721.42,7379.97 4733.92,7392.47 R131J.1@4749.13,7392.47 4763.26,7378.34 IC19J.5@4815.1,7378.34 4856.65,7378.34 4870.06,7391.75 v1@4875.97,7397.65 ; v1(4878.19,7401.94) 4901.11,7401.94 4909.81,7393.24 4928.99,7393.24 4934.56,7398.81 4997.13,7398.81 5002.1,7393.83 IC20J.1@5002.1,7378.34
  BottomLayer w6: D3.4@4874.02,7380.31 4878.19,7384.49 v1(4878.19,7401.94)
LVDS_IOAJ_P: D3.6 IC19J.6 IC20J.8 J15.3C R131J.2 | length 1238.5
  TopLayer w6: J15.3C@4467.72,7899.21 4508.21,7858.72 4508.21,7782.44 4495.87,7770.1 4495.87,7733.41 4532.43,7696.85 4577.35,7696.85 4608.21,7665.99 4608.21,7632.44 4561.34,7585.57 4561.34,7521.76 4600.17,7482.94 4662.73,7482.94 4680.46,7465.21 4680.46,7448.43 4680.46,7387.26 4699.75,7367.97 4721.42,7367.97 4733.92,7355.46 R131J.2@4749.13,7355.46 4751.16,7357.5 4813.94,7357.5 4816.26,7359.81 4856.06,7359.81 4862.62,7353.25 v1(4866.32,7353.25) ; IC19J.6@4816.86,7358.65 IC19J.6@4818.02,7359.81 ; v1(5044.13,7378.81) 5044.97,7377.97 5123.78,7377.97 IC20J.8@5124.15,7378.34
  BottomLayer w6: D3.6@4834.65,7380.31 4834.65,7364.17 4839.57,7359.25 4860.32,7359.25 v1(4866.32,7353.25) 5018.57,7353.25 v1(5044.13,7378.81)
LVDS_IOAK_N: D4.1 IC19K.5 IC20K.1 J15.5C R131K.1 | length 1179.2
  TopLayer w6: J15.5C@4467.72,7799.21 J15.5C@4486.07,7780.85 ; v1(4704.72,7253.94) 4723.34,7253.94 4724.08,7254.68 4772.88,7254.68 4787.02,7240.54 IC19K.5@4815.1,7240.54 4838.97,7240.54 v1@4856.79,7258.37 ; v1@4862.2,7263.78 4950.79,7263.78 4974.02,7240.54 IC20K.1@5002.1,7240.54
  BottomLayer w6: J15.5C@4467.72,7799.21 4471.65,7795.28 4609.01,7795.28 4682.88,7721.41 4682.88,7509.84 4682.88,7294.59 4704.72,7272.75 v1(4704.72,7253.94) ; D4.1@4809.06,7165.94 4809.06,7207.75 4853.35,7252.04 v1(4853.35,7261.81)
LVDS_IOAK_P: D4.3 IC19K.6 IC20K.8 J15.4C R131K.2 | length 1265.3
  TopLayer w6: v1(4721.64,7230.17) 4721.64,7229.95 4733.92,7217.67 R131K.2@4749.13,7217.67 4752.31,7220.86 IC19K.6@4815.1,7220.86 4848.81,7220.86 v1(4862.2,7234.25) ; v1(5039.37,7240.41) 5039.61,7240.17 5123.78,7240.17 IC20K.8@5124.15,7240.54
  BottomLayer w6: J15.4C@4567.72,7849.21 4537.4,7818.9 4537.4,7807.28 4613.98,7807.28 4694.88,7726.38 4694.88,7299.56 4723.57,7270.88 4723.57,7232.1 v1(4721.64,7230.17) ; D4.3@4848.43,7165.94 4859.84,7165.94 4865.52,7171.62 4865.52,7193.37 4865.52,7230.94 v1(4862.2,7234.25) 4881.69,7234.25 4893.77,7222.17 5009.19,7222.17 5027.43,7240.41 v1(5039.37,7240.41)
LVDS_IOAL_N: D3.1 IC19L.5 IC20L.1 J15.2C R131L.1 | length 1147.6
  TopLayer w6: J15.2C@4567.72,7949.21 4559.63,7949.21 4537.52,7971.32 4523.72,7971.32 4520.2,7967.8 4520.2,7937.09 4555.59,7901.71 4615.26,7901.71 4666.53,7850.44 4666.53,7850.03 4666.53,7841.02 ccw(c4672.53,7841.02) 4672.53,7835.02 4679.71,7835.02 cw(c4679.71,7819.62) 4695.11,7819.62 4695.11,7792.42 cw(c4679.71,7792.42) 4679.71,7777.02 4656.47,7777.02 ccw(c4656.47,7773.62) 4653.07,7773.62 4653.07,7746.42 ccw(c4656.47,7746.42) 4656.47,7743.02 4679.71,7743.02 cw(c4679.71,7727.62) 4695.11,7727.62 4695.11,7700.42 cw(c4679.71,7700.42) 4679.71,7685.02 4672.53,7685.02 ccw(c4672.53,7679.02) 4666.53,7679.02 4666.53,7643.7 4666.53,7621.85 4698.87,7589.51 4705.9,7582.48 4705.9,7532.29 4724.41,7513.78 4732.64,7513.78 4739.92,7521.06 4739.92,7521.85 4748.34,7530.27 R131L.1@4749.13,7530.27 4763.26,7516.13 IC19L.5@4815.1,7516.13 v1(4856.65,7516.13) 4877.13,7536.61 4997.13,7536.61 5002.1,7531.63 IC20L.1@5002.1,7516.13
  BottomLayer w6: D3.1@4834.65,7442.52 4834.65,7459.76 4825.44,7468.96 4825.44,7488.15 4844.9,7507.61 4848.13,7507.61 v1(4856.65,7516.13)
LVDS_IOAL_P: D3.3 IC19L.6 IC20L.8 J15.1C R131L.2 | length 1219.5
  TopLayer w6: J15.1C@4467.72,7999.21 4478.95,7999.21 4478.95,7991.47 4508.2,7962.22 4508.2,7932.12 4550.62,7889.71 4610.29,7889.71 4649.97,7850.03 4654.53,7845.47 4654.53,7841.02 ccw(c4672.53,7841.02) 4672.53,7823.02 4679.71,7823.02 cw(c4679.71,7819.62) 4683.11,7819.62 4683.11,7792.42 cw(c4679.71,7792.42) 4679.71,7789.02 4656.47,7789.02 ccw(c4656.47,7773.62) 4641.07,7773.62 4641.07,7746.42 ccw(c4656.47,7746.42) 4656.47,7731.02 4679.71,7731.02 cw(c4679.71,7727.62) 4683.11,7727.62 4683.11,7700.42 cw(c4679.71,7700.42) 4679.71,7697.02 4672.53,7697.02 ccw(c4672.53,7679.02) 4654.53,7679.02 4654.53,7643.7 4654.53,7616.88 4693.9,7577.51 4693.9,7523.39 4721.02,7496.26 4746.13,7496.26 R131L.2@4749.13,7493.26 ; R131L.2@4755.78,7496.45 IC19L.6@4815.1,7496.45 4876.58,7496.45 v1(4883.86,7489.17) ; v1(5044.13,7516.61) 5044.97,7515.76 5123.78,7515.76 IC20L.8@5124.15,7516.13
  BottomLayer w6: D3.3@4874.02,7442.52 4874.02,7479.33 v1(4883.86,7489.17) 4915.86,7489.17 4919.29,7492.61 5020.13,7492.61 v1(5044.13,7516.61)
LVDS_IOAM_N: D2.4 IC19M.5 IC20M.1 J15.8D R131M.1 | length 801.1
  TopLayer w6: J15.8D@4567.72,8199.21 4462.01,8199.21 4446.65,8183.85 4446.65,8167.43 4467.99,8146.09 4580.77,8146.09 4590.24,8155.56 4641.42,8206.74 4715.53,8206.74 4728.04,8219.24 R131M.1@4749.13,8219.24 4759.73,8208.65 v1(4773.61,8208.65) ; v1@4773.61,8205.11 IC19M.5@4815.1,8205.11 4856.65,8205.11 4877.13,8225.58 4997.13,8225.58 5002.1,8220.61 IC20M.1@5002.1,8205.11
  BottomLayer w6: D2.4@4749.81,8224.43 4767.92,8206.32 4770.24,8208.65 v1(4773.61,8208.65)
LVDS_IOAM_P: D2.6 IC19M.6 IC20M.8 J15.7D R131M.2 | length 891.7
  TopLayer w6: J15.7D@4467.72,8249.21 4456.81,8238.31 4434.16,8238.31 4428.62,8232.77 4428.62,8168.49 4463.02,8134.09 4585.74,8134.09 4589.26,8137.61 4646.39,8194.74 v1@4721.42,8194.74 ; v1@4725.8,8190.36 4733.92,8182.24 R131M.2@4749.13,8182.24 ; R131M.2@4755.78,8185.43 IC19M.6@4815.1,8185.43 4816.26,8186.58 4860.13,8186.58 v1(4865.13,8181.58) ; v1(5044.13,8205.58) 5044.97,8204.74 5123.78,8204.74 IC20M.8@5124.15,8205.11
  BottomLayer w6: D2.6@4710.44,8224.43 4710.44,8205.72 4724.4,8191.76 v1(4724.4,8188.96) ; v1(4865.13,8181.58) 4946.47,8181.58 4970.47,8205.58 v1(5044.13,8205.58)
LVDS_IOAN_N: D1.4 IC19N.5 IC20N.1 J15.6D R131N.1 | length 761.6
  TopLayer w6: v1(4724.4,8484.24) 4738.53,8484.24 R131N.1@4749.13,8494.83 4749.91,8494.83 4758.33,8486.42 4758.33,8485.63 4763.99,8479.97 4814.37,8479.97 IC19N.5@4815.1,8480.7 4846.27,8480.7 4863.6,8498.03 4973.94,8498.03 4991.28,8480.7 IC20N.1@5002.1,8480.7
  BottomLayer w6: J15.6D@4567.72,8299.21 4568.66,8300.16 4568.66,8336.19 4606.3,8373.83 4738.81,8373.83 4739.81,8374.83 4751.6,8374.83 4803.89,8427.12 4803.89,8456.93 4793.31,8467.52 4793.31,8488.33 4788.58,8493.06 4744.3,8493.06 4739.58,8488.33 4728.5,8488.33 v1(4724.4,8484.24) v1@4732.22,8484.24
LVDS_IOAN_P: D1.6 IC19N.6 IC20N.8 J15.3D R131N.2 | length 893.7
  TopLayer w6: v1(4721.13,8457.33) 4721.62,8457.83 R131N.2@4749.13,8457.83 ; R131N.2@4755.78,8461.02 4768.46,8461.02 4775.71,8468.27 4792.56,8468.27 4796.91,8463.92 4812.2,8463.92 IC19N.6@4815.1,8461.02 4816.01,8461.92 4866.45,8461.92 v1(4868.11,8463.58) ; v1(5044.13,8481.17) 5044.97,8480.33 5123.78,8480.33 IC20N.8@5124.15,8480.7
  BottomLayer w6: J15.3D@4467.72,8449.21 4499.22,8417.71 4517.12,8417.71 4540.12,8440.71 4601.61,8440.71 4613.19,8429.13 4613.19,8409.55 4636.92,8385.83 4747.05,8385.83 4766.61,8405.39 4766.61,8441.04 4755.04,8452.61 4755.04,8471.74 D1.6@4753.94,8472.83 4739.65,8472.83 4724.14,8457.33 v1(4721.13,8457.33) ; D1.6@4749.13,8469.83 D1.6@4750.03,8468.93 ; v1(4868.11,8463.58) 4869.49,8462.2 4881.38,8462.2 4886.41,8457.17 4936.63,8457.17 4960.63,8481.17 v1(5044.13,8481.17)
LVDS_IOAO_N: D2.3 IC19O.5 IC20O.1 J15.5D R131O.1 | length 824.8
  TopLayer w6: J15.5D@4467.72,8349.21 4432.8,8314.3 4432.8,8309.33 4445.87,8296.26 4476.53,8296.26 4501.57,8271.22 4525.04,8271.22 4540.52,8255.74 4621.66,8255.74 ; 4621.68,8255.72 4643.51,8277.56 4643.51,8302.21 4685.83,8344.54 4703.74,8344.54 4714.56,8355.35 v1(4714.56,8355.98) 4714.56,8356.28 4715.31,8357.04 R131O.1@4749.13,8357.04 4763.26,8342.91 4856.65,8342.91 4877.13,8363.38 4997.13,8363.38 5002.1,8358.4 IC20O.1@5002.1,8342.91
  BottomLayer w6: v1(4714.56,8355.98) 4714.86,8356.28 4724.32,8356.28 4749.81,8330.79 D2.3@4749.81,8286.64
LVDS_IOAO_P: D2.1 IC19O.6 IC20O.8 J15.4D R131O.2 | length 894.1
  TopLayer w6: v1(4517.72,8319.88) 4517.72,8349.21 J15.4D@4567.72,8399.21 ; v1(4518.39,8252.64) 4522.09,8252.64 4530.99,8243.74 4616.69,8243.74 ; 4616.71,8243.72 4626.65,8243.72 4655.51,8272.59 4655.51,8297.24 4690.8,8332.54 4721.42,8332.54 v1(4725.8,8328.16) 4733.92,8320.03 R131O.2@4749.13,8320.03 4755.78,8323.22 4857.58,8323.22 4861.42,8319.38 v1(4865.13,8319.38) ; v1(5044.13,8343.38) 5044.97,8342.54 5123.78,8342.54 IC20O.8@5124.15,8342.91
  BottomLayer w6: v1(4517.72,8319.88) 4518.21,8319.39 4518.21,8252.82 v1(4518.39,8252.64) ; D2.1@4710.44,8286.64 4710.44,8312.8 v1(4725.8,8328.16) ; v1(4865.13,8319.38) 4946.47,8319.38 4970.47,8343.38 v1(5044.13,8343.38)
LVDS_IOAP_N: D1.3 IC19P.5 IC20P.1 J15.2D R131P.1 | length 770.6
  TopLayer w6: v1(4722.13,8632.13) 4722.63,8632.63 R131P.1@4749.13,8632.63 4763.26,8618.5 4838.47,8618.5 4864.81,8644.84 4996.89,8644.84 5002.1,8639.63 IC20P.1@5002.1,8618.5
  BottomLayer w6: J15.2D@4567.72,8499.21 4557.09,8509.84 4557.09,8543.31 4564.77,8550.99 4677.35,8550.99 4713.53,8514.82 4783.26,8514.82 4793.31,8524.87 D1.3@4793.31,8535.04 4793.31,8559.02 4785.62,8566.71 4785.62,8579.77 4765.8,8599.6 4745.43,8619.97 4734.29,8619.97 v1(4722.13,8632.13)
LVDS_IOAP_P: D1.1 IC19P.6 IC20P.8 J15.1D R131P.2 | length 889.7
  TopLayer w6: v1(4717.75,8591.95) 4717.95,8591.95 4721.62,8595.62 R131P.2@4749.13,8595.62 4752.32,8598.81 IC19P.6@4815.1,8598.81 4816.26,8599.97 4858.39,8599.97 v1(4865.13,8606.71) ; v1(5043.28,8618.13) 5123.78,8618.13 IC20P.8@5124.15,8618.5
  BottomLayer w6: J15.1D@4467.72,8549.21 4468.66,8548.26 4468.66,8512.23 4475.98,8504.92 4501.72,8504.92 4559.79,8562.99 4682.33,8562.99 4696.8,8548.51 4715.53,8548.51 4719.78,8552.76 4737.93,8552.76 D1.1@4753.94,8536.76 ; v1(4717.75,8591.95) 4739.5,8591.95 4753.94,8577.52 D1.1@4753.94,8536.76 ; D1.1@4753.94,8535.04 D1.1@4753.94,8536.76 ; v1(4865.13,8606.71) 4876.16,8617.74 4876.16,8627.8 4887.2,8638.84 4902.8,8638.84 4922.68,8618.97 v1@5044.13,8618.97
NetC7_2: C7.2 IC3.6 IC3.7 R55.2 T3.3 | length 506.9
  TopLayer w10: IC3.6@10201.77,6429.72 IC3.7@10201.77,6479.72 10275.2,6479.72 C7.2@10276.57,6478.35 10276.57,6610.24 10301.18,6634.84 10439.96,6634.84 10471.46,6603.35 T3.3@10471.46,6571.85
NetC9_2: C9.2 D14.1 R56.2 | length 164.9
  TopLayer w12: D14.1@9781.47,6480.28 9781.47,6501.94 9798.2,6518.68 9798.2,6593.62 9811.2,6606.61 R56.2@9811.2,6632.84
NetC10_2: C10.2 IC3.5 | length 106.3
  TopLayer w10: IC3.5@10201.77,6379.72 C10.2@10308.07,6379.72
NetD11_6: D11.6 J1.K2 R43.2 | length 982.7
  TopLayer w6: R43.2@11173.19,6366.3 11503.38,6366.3 11506.89,6362.79 D11.6@11506.89,6337.6 11507.54,6336.95 11507.54,6277.14 11561.1,6223.59 12002.7,6223.59 12031.5,6252.38 J1.K2@12031.5,6255.91
NetD12_1: D12.1 J1.F3 R40.1 | length 1997.1
  TopLayer w6: v1(10595.97,6613.68) R40.1@10636.81,6613.68 ; v1(11411.42,6501.97) 11453.74,6501.97 D12.1@11455.71,6503.94 ; v1(11657.48,6326.77) 11889.01,6326.77 11927.81,6365.57 12272.22,6365.57 J1.F3@12303.15,6334.65
  BottomLayer w6: v1(10595.97,6613.68) 10677.66,6613.68 10744.09,6680.12 11193.9,6680.12 11372.05,6501.97 v1(11411.42,6501.97) 11484.25,6501.97 11657.48,6328.74 v1(11657.48,6326.77)
NetD12_3: D12.3 J1.C3 R39.1 | length 1556.3
  TopLayer w6: R39.1@11188.98,6630.91 11202.76,6617.13 11358.27,6617.13 11440.35,6535.04 11506.89,6535.04 ; D12.3@11506.89,6503.94 11506.89,6535.04 ; J1.C3@12468.5,6334.65 12421.06,6287.2 11642.13,6287.2 11582.5,6346.82 11582.5,6489.57 11537.03,6535.04 11506.89,6535.04
NetD12_6: D12.6 J1.I3 R42.1 | length 1076.5
  TopLayer w6: R42.1@11344.49,6659.45 11416.34,6659.45 11455.71,6620.08 D12.6@11455.71,6590.55 11455.71,6557.84 11460.39,6553.15 11534.49,6553.15 11593.5,6494.13 11593.5,6351.38 11644.69,6300.2 12103.35,6300.2 J1.I3@12137.8,6334.65
NetD13_2: D13.2 D14.2 IC3.2 | length 192.2
  TopLayer w8: D13.2@9883.83,6393.67 D14.2@9883.83,6480.28 9884.11,6480 9988.9,6480 IC3.2@9989.17,6479.72
NetIC2_1: IC2.1 IC2.11 R46.1 R48.1 R49.1 | length 696.1
  TopLayer w6: 10699.8,6674.95 10727.36,6674.95 10740.16,6662.16 10740.16,6636.81 10755.91,6621.06 IC2.11@10798.23,6621.06 10846.46,6621.06 v1(10868.11,6599.41) ; IC2.1@11026.58,6544.29 11073.82,6544.29 11098.43,6568.9 11139.16,6568.9 11139.16,6515.75 v1(11083.66,6515.75)
  BottomLayer w6: v1(10868.11,6599.41) 10951.77,6515.75 v1(11083.66,6515.75)
NetIC2_8: IC2.8 R51.1 R55.1 | length 669.3
  TopLayer w6: v1(10584.65,6739.17) 10633.86,6739.17 R51.1@10636.81,6736.22 10636.81,6760.83 10650.59,6774.61 10754.92,6774.61 10792.74,6736.78 10792.74,6703.32 IC2.8@10798.23,6697.83
  TopLayer w8: R55.1@10339.54,6549.18 10340.55,6550.19 v1(10340.55,6600.39)
  BottomLayer w8: v1(10340.55,6600.39) 10340.55,6633.86 10443.63,6736.94 10582.41,6736.94 v1(10584.65,6739.17)
NetIC2_9: IC2.9 IC2.10 R48.2 R49.2 R51.2 | length 709.8
  TopLayer w6: R51.2@10699.8,6736.22 10700.79,6735.24 10727.36,6735.24 10737.2,6725.39 10737.2,6692.91 10757.87,6672.24 IC2.9@10798.23,6672.24 IC2.10@10798.23,6646.65 10886.81,6646.65 v1(10912.4,6621.06)
  TopLayer w8: R48.2@11176.25,6513.51 11176.25,6572.38 11176.31,6572.44 v1(11212.57,6572.44)
  BottomLayer w6: v1(10912.4,6621.06) 10963.58,6621.06 11012.21,6572.44 v1(11212.57,6572.44)
NetIC3_4: IC3.4 R54.1 | length 131.6
  TopLayer w8: 9918.28,6301.15 9958.64,6301.15 9989.17,6331.68 IC3.4@9989.17,6379.72
NetIC4_3: IC4.3 R70.1 | length 183
  TopLayer w10: R70.1@9159.25,6691.84 9252.06,6691.84 9277.56,6666.34 IC4.3@9277.56,6612.2
NetIC4_7: IC4.7 R71.2 | length 87.1
  TopLayer w10: R71.2@9251.88,6872.46 9251.92,6872.41 9251.92,6785.48 IC4.7@9251.97,6785.43
NetIC20A_3: IC20A.3 R133A.1 T25A.3 | length 522.2
  TopLayer w6: IC20A.3@5002.1,6512.2 5035.28,6512.2 v1(5037.13,6514.04) ; v1(5078.13,6570.04) 5090.13,6582.04 5252.13,6582.04 5272.64,6561.52 T25A.3@5272.64,6516.73 ; T25A.3@5269.69,6525.59 5277.36,6517.91 R133A.1@5425.2,6517.91
  BottomLayer w6: v1(5037.13,6514.04) 5040.48,6514.04 5063.81,6537.37 5063.81,6555.72 v1(5078.13,6570.04)